# EAGLE board bb-8.bak (EAGLE 9.6.2)
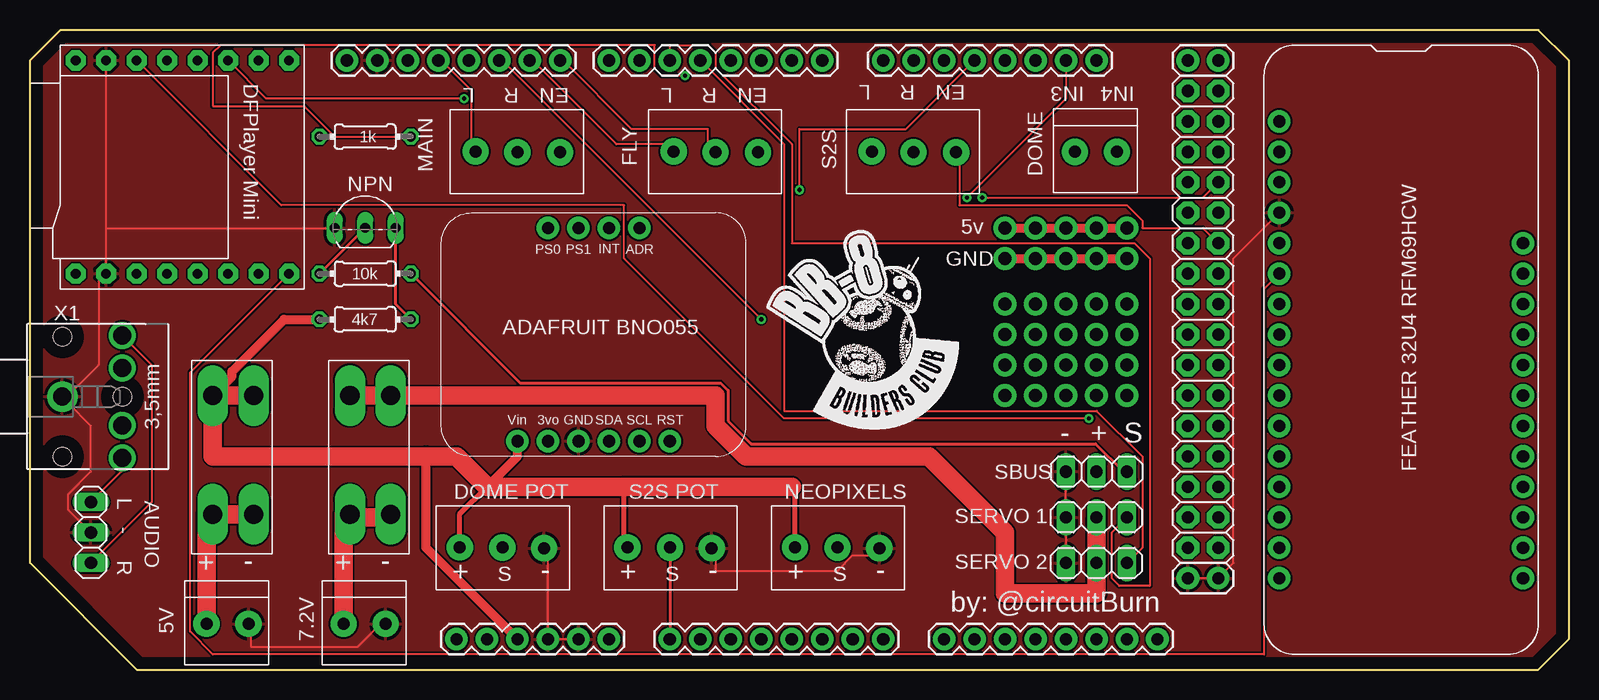
[diagram p0: board, top side]
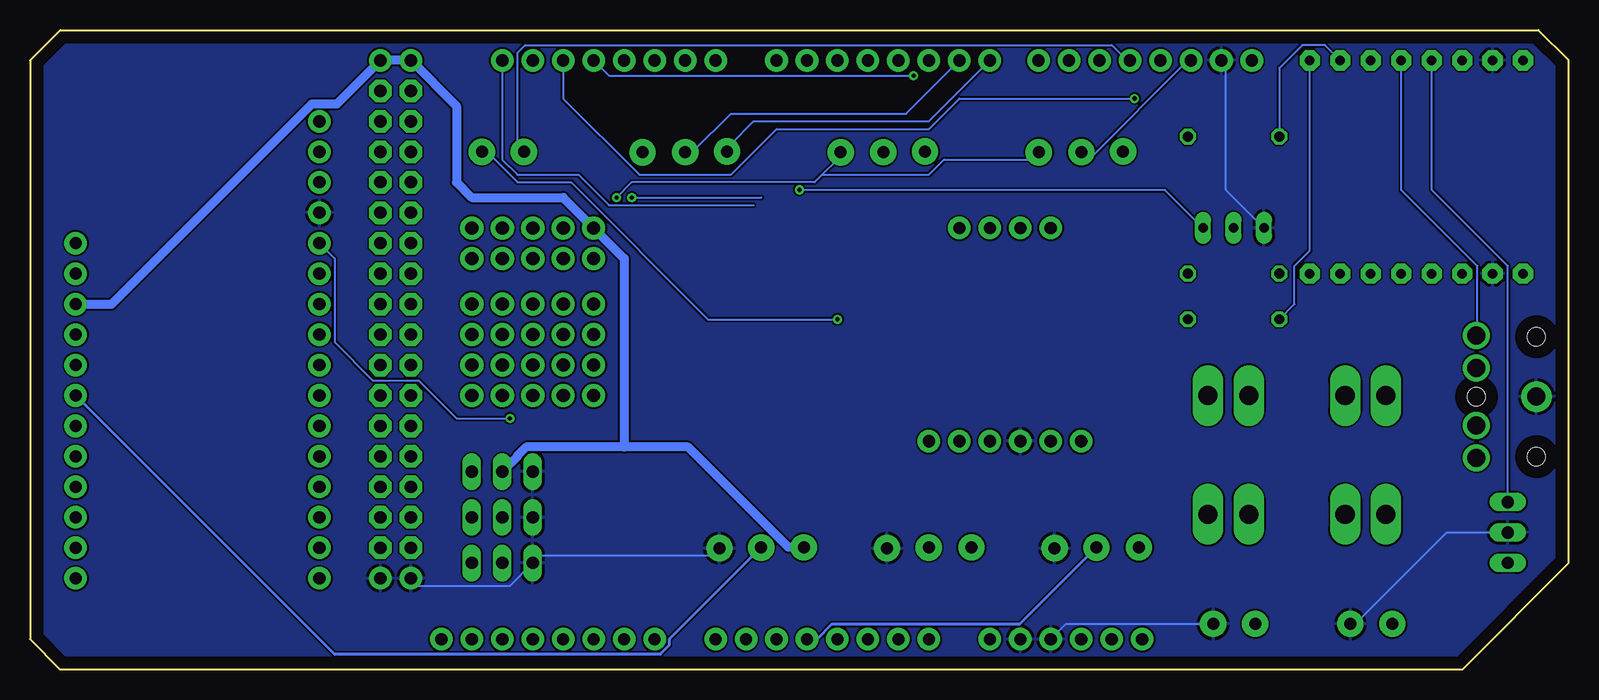
[diagram p1: board, bottom side, seen from below]

Size 128.27 x 53.34 mm. Coordinates in mm from the lower left corner, seen from the top.
Outline: 0,8.89 0,50.8 2.54,53.34 125.73,53.34 128.27,50.8 128.27,2.54 125.73,0 8.89,0 0,8.89
Copper layers (1*16): Top 0.035mm / dielectric 1.5mm / Bottom 0.035mm
Design rules "default": minimum track width 6mil, minimum drill 0.35mm, track to track 6mil, track to pad 6mil, pad to pad 6mil, via to via 6mil, smd to smd 6mil, copper to edge 40mil, drill to drill 6mil, minimum pad ring 10mil, minimum via ring 8mil, stop-mask expansion 4mil, vias tented up to drill 0mil, thermal gap 10mil

## Footprints (pad centres in the part's own frame; a part is rotated, then mirrored left to right if it is on the bottom)
1X2-3.5MM = drill 1 pad 2.184: 1 1.8,0; 2 -1.7,0
SCREW_TERMINAL_3_PIN = drill 1 pad 2.184: 1 -3.54,0.04; 2 0.01,0.02; 3 3.49,-0.03
1X03 = drill 1.016 long: 1 -2.54,0; 2 0,0; 3 2.54,0
0204/7 = drill 0.813 octagon: 1 -3.81,0; 2 3.81,0
TO92-EBC-OVAL = drill 0.813 long: B 0,-1.27; C 2.54,-1.27; E -2.54,-1.27
DFPLAYER = drill 0.8 pad 1.676 octagon: ADKEY1 8.89,-1.27; ADKEY2 8.89,1.27; BUSY 8.89,8.89; DAC_L -8.89,-1.27; DAC_R -8.89,1.27; GND_1 -8.89,-6.35; GND_2 8.89,-6.35; IO1 8.89,-8.89; IO2 8.89,-3.81; RX -8.89,6.35; SPK1 -8.89,-3.81; SPK2 -8.89,-8.89; TX -8.89,3.81; USB+ 8.89,3.81; USB- 8.89,6.35; VCC -8.89,8.89
ADAFRUIT_BNO055 = drill 1.016 pad 1.88: 3V0 8.89,1.27; ADR 16.51,19.05; GND 11.43,1.27; INT 13.97,19.05; PS0 8.89,19.05; PS1 11.43,19.05; RST 19.05,1.27; SCL 16.51,1.27; SDA 13.97,1.27; VIN 6.35,1.27
ADAFRUIT_FEATHER_32U4 = drill 1.016 pad 1.88: 0RX 39.37,1.27; 1TX 41.91,1.27; 3V 8.89,1.27; 6 36.83,21.59; 10 31.75,21.59; 11 29.21,21.59; 12 26.67,21.59; 13 24.13,21.59; A0 16.51,1.27; A1 19.05,1.27; A2 21.59,1.27; A3 24.13,1.27; A4 26.67,1.27; A5 29.21,1.27; A9 34.29,21.59; AREF 11.43,1.27; BAT 16.51,21.59; DFU 44.45,1.27; EN 19.05,21.59; GND 13.97,1.27; MISO 36.83,1.27; MOSI 34.29,1.27; RST 6.35,1.27; SCK 31.75,1.27; SCL 41.91,21.59; SDA 44.45,21.59; USB 21.59,21.59; ~5 39.37,21.59
KEYSTONE_3568 = drill 1.6 pad 2.54 long: 1A 3.81,2.54; 1B 3.81,5.944; 2A 13.716,2.54; 2B 13.716,5.944
ARDUINO_MEGA_SHIELD = drill 1.016 pad 1.88: 0 13.97,24.13; 1 11.43,24.13; 2 8.89,24.13; 3 6.35,24.13; 3.3V -13.97,-24.13; 4 3.81,24.13; 5 1.27,24.13; 5V@0 -11.43,-24.13; 5V@1 44.45,24.13; 5V@2 46.99,24.13; 6 -1.27,24.13; 7 -3.81,24.13; 8 -7.874,24.13; 9 -10.414,24.13; 10 -12.954,24.13; 11 -15.494,24.13; 12 -18.034,24.13; 13 -20.574,24.13; 14 19.05,24.13; 15 21.59,24.13; 16 24.13,24.13; 17 26.67,24.13; 18 29.21,24.13; 19 31.75,24.13; 20 34.29,24.13; 21 36.83,24.13; A0 1.27,-24.13; A1 3.81,-24.13; A2 6.35,-24.13; A3 8.89,-24.13; A4 11.43,-24.13; A5 13.97,-24.13; A6 16.51,-24.13; A7 19.05,-24.13; A8 24.13,-24.13; A9 26.67,-24.13; A10 29.21,-24.13; A11 31.75,-24.13; A12 34.29,-24.13; A13 36.83,-24.13; A14 39.37,-24.13; A15 41.91,-24.13; AREF -25.654,24.13; GND@0 -8.89,-24.13; GND@1 -6.35,-24.13; GND@2 44.45,-19.05; GND@3 46.99,-19.05; GND@4 -23.114,24.13; RESET -16.51,-24.13; VIN -3.81,-24.13 | drill 1.016 pad 1.88 octagon: 22 44.45,21.59; 23 46.99,21.59; 24 44.45,19.05; 25 46.99,19.05; 26 44.45,16.51; 27 46.99,16.51; 28 44.45,13.97; 29 46.99,13.97; 30 44.45,11.43; 31 46.99,11.43; 32 44.45,8.89; 33 46.99,8.89; 34 44.45,6.35; 35 46.99,6.35; 36 44.45,3.81; 37 46.99,3.81; 38 44.45,1.27; 39 46.99,1.27; 40 44.45,-1.27; 41 46.99,-1.27; 42 44.45,-3.81; 43 46.99,-3.81; 44 44.45,-6.35; 45 46.99,-6.35; 46 44.45,-8.89; 47 46.99,-8.89; 48 44.45,-11.43; 49 46.99,-11.43; 50 44.45,-13.97; 51 46.99,-13.97; 52 44.45,-16.51; 53 46.99,-16.51
STX3100 = drill 1.5 pad 2.54: 1 2.7,-0.1 | drill 1.5: 2 7.7,5; 3 7.7,2.3; 4 7.7,-2.5; 5 7.7,-5.2 | hole 1.5: 2.7,4.9; 2.7,-5.1; 7.7,-0.1

## Placement (x,y rotation side)
5V  1X2-3.5MM  [1X2-3.5MM]  16.51,3.81 180 top
7.2V  1X2-3.5MM  [1X2-3.5MM]  27.94,3.81 180 top
BODYLIGHTS  SCREW_TERMINAL_3_PIN  [SCREW_TERMINAL_3_PIN]  67.31,10.16 0 top
DOME  1X2-3.5MM  [1X2-3.5MM]  88.9,43.18 180 top
DOME_POT  SCREW_TERMINAL_3_PIN  [SCREW_TERMINAL_3_PIN]  39.37,10.16 0 top
FLY  SCREW_TERMINAL_3_PIN  [SCREW_TERMINAL_3_PIN]  57.15,43.18 180 top
JP1  [1X03]  5.08,11.43 270 top
MAIN  SCREW_TERMINAL_3_PIN  [SCREW_TERMINAL_3_PIN]  40.64,43.18 180 top
R1  10k  [0204/7]  27.94,33.02 180 top
R2  4k7  [0204/7]  27.94,29.21 180 top
R3  1k  [0204/7]  27.94,44.45 180 top
S2S  SCREW_TERMINAL_3_PIN  [SCREW_TERMINAL_3_PIN]  73.66,43.18 180 top
S2S_POT  SCREW_TERMINAL_3_PIN  [SCREW_TERMINAL_3_PIN]  53.34,10.16 0 top
SBUS  [1X03]  88.9,16.51 0 top
SERVO1  [1X03]  88.9,12.7 180 top
SERVO2  [1X03]  88.9,8.89 180 top
T1  2N2222  [TO92-EBC-OVAL]  27.94,38.1 0 top
U$1  DFPLAYER  [DFPLAYER]  12.7,41.91 270 top
U$2  ADAFRUIT_BNO055  [ADAFRUIT_BNO055]  34.29,17.78 0 top
U$3  ADAFRUIT_FEATHER_32U4  [ADAFRUIT_FEATHER_32U4]  102.87,52.07 270 top
U$4  KEYSTONE_3568  [KEYSTONE_3568]  12.7,26.67 270 top
U$5  KEYSTONE_3568  [KEYSTONE_3568]  24.13,26.67 270 top
U$7  ARDUINO_MEGA_SHIELD  [ARDUINO_MEGA_SHIELD]  52.07,26.67 0 top
X1  STEREOJACK  [STX3100]  0,22.86 0 top

## Library data of the parts
5V 7.2V DOME T1 X1 = adafruit
BODYLIGHTS DOME_POT FLY MAIN S2S S2S_POT U$2-U$5 U$7 = BB8
JP1 SBUS SERVO1 SERVO2 = pinhead
R1-R3 = rcl; SPICEPREFIX: R
U$1 = DFPlayer_v1

## Nets
+5V: BODYLIGHTS.1 DOME_POT.1 R2.2 S2S_POT.1 SBUS.2 U$1.VCC U$2.VIN U$3.USB U$4.1A U$7.5V@0 U$7.5V@1 U$7.5V@2
+7V: SERVO1.2 SERVO2.2 U$5.1A
BUSY: U$1.BUSY U$3.A1
DAC_R: JP1.3 U$1.DAC_R X1.2
DOME_POT: DOME_POT.2 U$7.A4
FLY_LPWM: FLY.3 U$7.9
FLY_RPWM: FLY.2 U$7.8
GND: 5V.2 7.2V.2 BODYLIGHTS.3 DOME_POT.3 JP1.2 S2S_POT.3 SBUS.1 SERVO1.3 SERVO2.3 T1.E U$1.GND_1 U$1.GND_2 U$2.GND U$3.GND U$7.GND@0 U$7.GND@1 U$7.GND@2 U$7.GND@3 U$7.GND@4 X1.1
IN3: DOME.1 U$7.11
IN4: DOME.2 U$7.10
MAIN_EN: FLY.1 MAIN.1 U$7.29
MAIN_LPWM: MAIN.3 U$7.12
MAIN_RPWM: MAIN.2 U$7.13
N$3: R1.2 T1.B
N$4: R3.2 U$1.RX
N$5: R1.1 SBUS.3
N$6: JP1.1 U$1.DAC_L X1.5
N$20: 5V.1 U$4.2A
N$21: 7.2V.1 U$5.2A
NEO: BODYLIGHTS.2 U$3.11
RX1: U$1.TX U$7.19
S2S_EN: S2S.1 U$7.33
S2S_LPWM: S2S.3 U$7.7
S2S_POT: S2S_POT.2 U$7.A0
S2S_RPWM: S2S.2 U$7.6
SBUS: R2.1 T1.C U$7.17
SCL: U$2.SCL U$7.21
SDA: U$2.SDA U$7.20
SERVO_1: SERVO1.1 U$7.5
SERVO_2: SERVO2.1 U$7.4
SPK: U$1.SPK1 U$3.A0
TX1: R3.1 U$7.18

## Tracks (layer width: path | path; a pad name or v marks a point on that pad's centre or on a via)
+5V
  Top 0.406: S2S_POT.1 49.53,10.47 49.53,15.24 | DOME_POT.1 35.83,12.97 38.1,15.24 | BODYLIGHTS.1 63.77,14.97
  Top 0.762: 38.1,15.24 40.64,17.78 U$2.VIN | 63.77,14.97 63.5,15.24 | U$4.1A 16.84,24.46 16.84,24.88 21.17,29.21 R2.2 | U$7.5V@0 33.02,10.16 33.02,17.78
  Top 1.524: 63.5,15.24 49.53,15.24 38.1,15.24 35.56,17.78 33.02,17.78 15.24,17.78 U$4.1A 19.05,22.86
  Bottom 0.152: U$1.VCC 21.59,34.92 22.86,33.66 22.86,30.48 R2.2
  Bottom 0.762: BODYLIGHTS.1 65.04,10.2 73.41,18.57 78.74,18.57 | SBUS.2 87.66,17.75 87.66,17.81 86.9,18.57 78.74,18.57 | 78.74,18.57 78.74,34.29 83.82,39.37 91.44,39.37 92.71,40.64 92.71,46.99 U$7.5V@1 U$7.5V@2 102.67,47.19 104.75,47.19 121.46,30.48 U$3.USB
+7V
  Top 1.524: U$5.1A 57.15,22.86 57.15,20.32 59.69,17.78 74.93,17.78 81.28,11.43 81.28,6.35 88.9,6.35 SERVO1.2
BUSY
  Top 0.152: U$1.BUSY 13.34,24.77 13.34,3.17 15.24,1.27 102.87,1.27 102.87,31.75 U$3.A1
DAC_R
  Top 0.152: JP1.3 10.16,13.97 10.16,25.4 X1.2
  Bottom 0.152: U$1.DAC_R 13.97,40.01 7.62,33.66 7.62,27.94 X1.2
DOME_POT
  Bottom 0.254: DOME_POT.2 45.8,3.76 61.47,3.76 62.68,2.54 U$7.A4
FLY_LPWM
  Top 0.152: U$7.9 41.91,50.8 48.9,43.81 53.34,43.81 FLY.3
FLY_RPWM
  Top 0.152: U$7.8 44.45,50.8 50.16,45.09 56.52,45.09 56.52,43.18 FLY.2
GND
  Top 0.152: SERVO2.3 SERVO1.3 SBUS.1 | U$7.GND@2 U$7.GND@3 100.33,8.89 100.33,34.29 U$3.GND | 6.35,36.83 T1.E | 6.35,36.83 U$1.GND_2 5.71,32.38 5.71,25.4 3.17,22.86 X1.1 3.17,22.23 5.08,20.32 5.08,16.51 3.17,14.61 3.17,13.34 JP1.2 | 6.35,36.83 U$1.GND_1 | 7.2V.2 29.21,3.81 27.3,1.91 18.41,1.91 18.41,3.81 5V.2 | U$7.GND@1 U$7.GND@0 43.18,9.53 DOME_POT.3 | BODYLIGHTS.3 70.48,9.53 68.58,9.53 67.31,8.26 57.15,8.26 57.15,9.53 S2S_POT.3
  Bottom 0.152: BODYLIGHTS.3 71.12,9.53 85.72,9.53 SERVO2.3 88.27,6.99 95.89,6.99 U$7.GND@2 | T1.E 28.57,40.01 28.57,50.8 U$7.GND@4 | JP1.2 10.16,11.43 17.78,3.81 5V.2 | 56.52,9.53 S2S_POT.3 | 43.18,10.16 DOME_POT.3 | 7.2V.2 41.91,3.81 U$7.GND@0
  pour Bottom: 0,50.8 2.54,53.34 125.73,53.34 128.27,50.8 128.27,2.54 125.73,0 8.89,0 0,8.89
  pour Top: 0,8.89 0,50.8 2.54,53.34 125.73,53.34 128.27,50.8 128.27,2.54 125.73,0 8.89,0
IN3
  Bottom 0.152: U$7.11 36.83,50.8 38.1,52.07 87,52.07 87.63,51.44 87.63,43.18 DOME.1
IN4  (via drill 0.35)
  Top 0.152: v60.96,29.21 39.37,50.8 U$7.10
  Bottom 0.152: v60.96,29.21 71.75,29.21 83.19,40.64 87.63,40.64 90.17,43.18 DOME.2
MAIN_EN  (via drill 0.35)
  Top 0.152: U$7.29 97.79,39.37 v79.38,39.37
  Bottom 0.152: v79.38,39.37 78.11,40.64 62.87,40.64 62.23,41.27 | 62.23,41.27 60.96,42.55 FLY.1 | 62.23,41.27 53.34,41.27 52.07,42.55 44.45,42.55 MAIN.1
MAIN_LPWM
  Top 0.152: U$7.12 34.29,50.8 36.83,48.26 36.83,43.81 MAIN.3
MAIN_RPWM
  Bottom 0.152: U$7.13 31.75,50.8 40.01,42.55 MAIN.2
N$1  (via drill 1.1 pad 1.93)
  Top 0.762: v81.28,34.29 91.44,34.29
N$2  (via drill 1.1 pad 1.93)
  other vias: 83.82,34.29
N$3
  Top 0.254: T1.B R1.2
N$4
  Bottom 0.152: R3.2 24.13,50.16 22.23,52.07 20.32,52.07 U$1.RX
N$5
  Top 0.254: R1.1 40.87,23.9 57.58,23.9 58.19,23.29 58.19,20.75 60.12,18.82 88.82,18.82 91.14,16.51 SBUS.3
N$6
  Top 0.152: JP1.1 7.62,16.51 7.62,17.14 X1.5
  Bottom 0.152: U$1.DAC_L 11.43,40.01 5.08,33.66 JP1.1
N$7  (via drill 1.1 pad 1.93)
  other vias: 86.36,34.29
N$8  (via drill 1.1 pad 1.93)
  other vias: 88.9,34.29
N$9  (via drill 1.1 pad 1.93)
  other vias: 91.44,34.29
N$10  (via drill 1.1 pad 1.93)
  other vias: 91.44,36.83
N$11  (via drill 1.1 pad 1.93)
  other vias: 88.9,36.83
N$12  (via drill 1.1 pad 1.93)
  other vias: 86.36,36.83
N$13  (via drill 1.1 pad 1.93)
  other vias: 83.82,36.83
N$14  (via drill 1.1 pad 1.93)
  Top 0.762: v81.28,36.83 91.44,36.83
N$15  (via drill 1.1 pad 1.93)
  other vias: 81.28,22.86
N$16  (via drill 1.1 pad 1.93)
  other vias: 83.82,22.86
N$17  (via drill 1.1 pad 1.93)
  other vias: 86.36,22.86
N$18  (via drill 1.1 pad 1.93)
  other vias: 88.9,22.86
N$19  (via drill 1.1 pad 1.93)
  other vias: 91.44,22.86
N$20
  Top 1.524: 5V.1 14.71,12.95 U$4.2A 18.8,12.95 19.05,12.7
N$21
  Top 1.524: 7.2V.1 26.14,12.95 U$5.2A 26.92,12.7 30.48,12.7
N$25  (via drill 1.1 pad 1.93)
  other vias: 81.28,25.4
N$26  (via drill 1.1 pad 1.93)
  other vias: 83.82,25.4
N$27  (via drill 1.1 pad 1.93)
  other vias: 86.36,25.4
N$28  (via drill 1.1 pad 1.93)
  other vias: 88.9,25.4
N$29  (via drill 1.1 pad 1.93)
  other vias: 91.44,25.4
N$35  (via drill 1.1 pad 1.93)
  other vias: 81.28,27.94
N$36  (via drill 1.1 pad 1.93)
  other vias: 83.82,27.94
N$37  (via drill 1.1 pad 1.93)
  other vias: 86.36,27.94
N$38  (via drill 1.1 pad 1.93)
  other vias: 88.9,27.94
N$39  (via drill 1.1 pad 1.93)
  other vias: 91.44,27.94
N$50  (via drill 1.1 pad 1.93)
  other vias: 81.28,30.48
N$51  (via drill 1.1 pad 1.93)
  other vias: 83.82,30.48
N$52  (via drill 1.1 pad 1.93)
  other vias: 86.36,30.48
N$53  (via drill 1.1 pad 1.93)
  other vias: 88.9,30.48
N$54  (via drill 1.1 pad 1.93)
  other vias: 91.44,30.48
NEO
  Bottom 0.254: BODYLIGHTS.2 74.98,2.52 74.98,2.04 75.75,1.27 102.87,1.27 U$3.11
RX1  (via drill 0.35)
  Top 0.152: U$1.TX 19.68,47.62 v36.2,47.62
  Bottom 0.152: v36.2,47.62 50.8,47.62 53.34,45.09 66.04,45.09 69.85,41.27 77.47,41.27 83.82,47.62 U$7.19
S2S_EN
  Top 0.152: U$7.33 97.79,36.83 92.71,36.83 92.71,37.47 91.44,38.73 77.47,38.73 77.47,42.55 S2S.1
S2S_LPWM
  Bottom 0.152: U$7.7 53.34,45.72 67.94,45.72 69.85,43.81 S2S.3
S2S_POT
  Top 0.254: S2S_POT.2 U$7.A0
S2S_RPWM
  Bottom 0.152: U$7.6 55.24,46.35 69.85,46.35 73.03,43.18 S2S.2
SBUS  (via drill 0.35)
  Top 0.152: U$7.17 73.03,45.09 64.14,45.09 v64.14,40.01
  Top 0.254: R2.1 30.48,30.48 T1.C
  Bottom 0.152: v64.14,40.01 33.66,40.01 T1.C
SCL
  Bottom 0.152: 67.94,38.73 80.01,38.73 82.55,41.27 87.63,41.27 88.9,42.55 U$7.21
SDA  (via drill 0.35)
  Top 0.152: v78.11,39.37 86.36,47.62 U$7.20
  Bottom 0.152: v78.11,39.37 67.31,39.37
SERVO_1
  Top 0.152: SERVO1.1 90.17,11.43 90.17,7.62 90.81,6.99 93.34,6.99 93.34,34.29 92.08,35.56 63.5,35.56 63.5,43.81 57.15,50.16 57.15,51.44 56.52,52.07 53.34,52.07 U$7.5
SERVO_2
  Top 0.152: SERVO2.1 92.71,10.16 92.71,17.78 88.9,21.59 62.87,21.59 62.87,43.81 U$7.4
SPK  (via drill 0.35)
  Top 0.152: U$1.SPK1 20.95,38.73 49.53,38.73 49.53,34.29 62.87,20.95 v88.27,20.95
  Bottom 0.152: v88.27,20.95 92.71,20.95 95.89,24.13 99.69,24.13 102.87,27.3 102.87,34.29 U$3.A0
TX1  (via drill 0.35)
  Top 0.152: v54.61,49.53 52.7,49.53 52.07,50.16 52.07,52.07 15.88,52.07 15.24,51.44 15.24,46.99 22.86,46.99 25.4,44.45 R3.1
  Bottom 0.152: v54.61,49.53 80.01,49.53 U$7.18

## Text on the board
tPlace: L | R | EN | L | R | EN | L | R | EN | IN3 | IN4 | 1k | NPN | 10k | 4k7 | - | + | S | L | AUDIO | DOME POT | S2S POT | - | SERVO 1 | R | + | - | + | - | SERVO 2 | + | S | - | + | S | - | + | S | - | by: @circuitBurn
tNames: 5v | GND | ADAFRUIT BNO055 | FEATHER 32U4 RFM69HCW | NEOPIXELS